# EAGLE board DataCollectorV1 v6 (EAGLE 9.7.0)
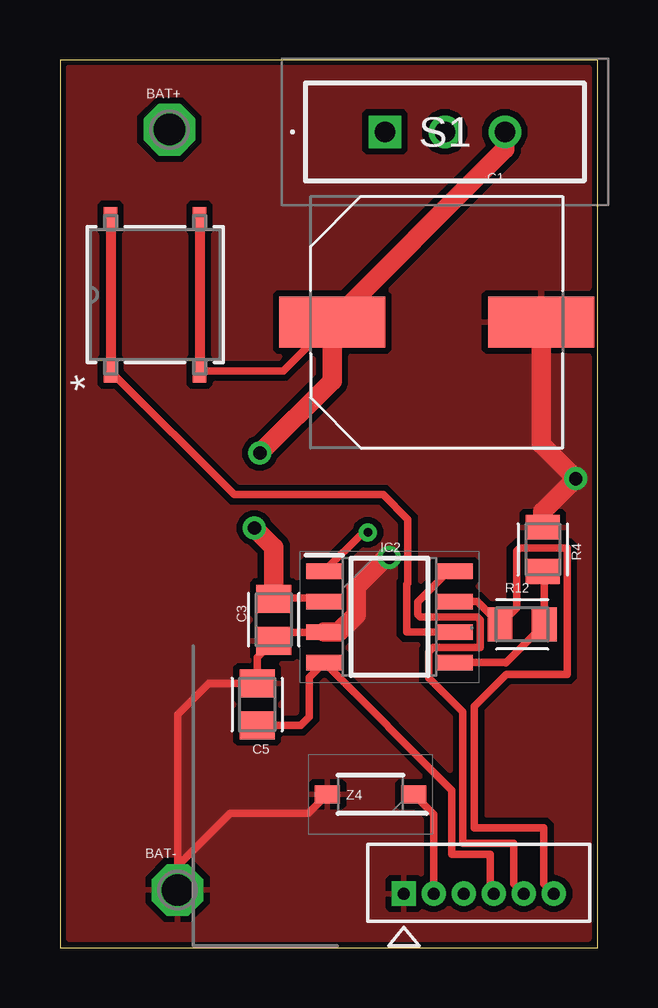
[diagram p0: board, top side]
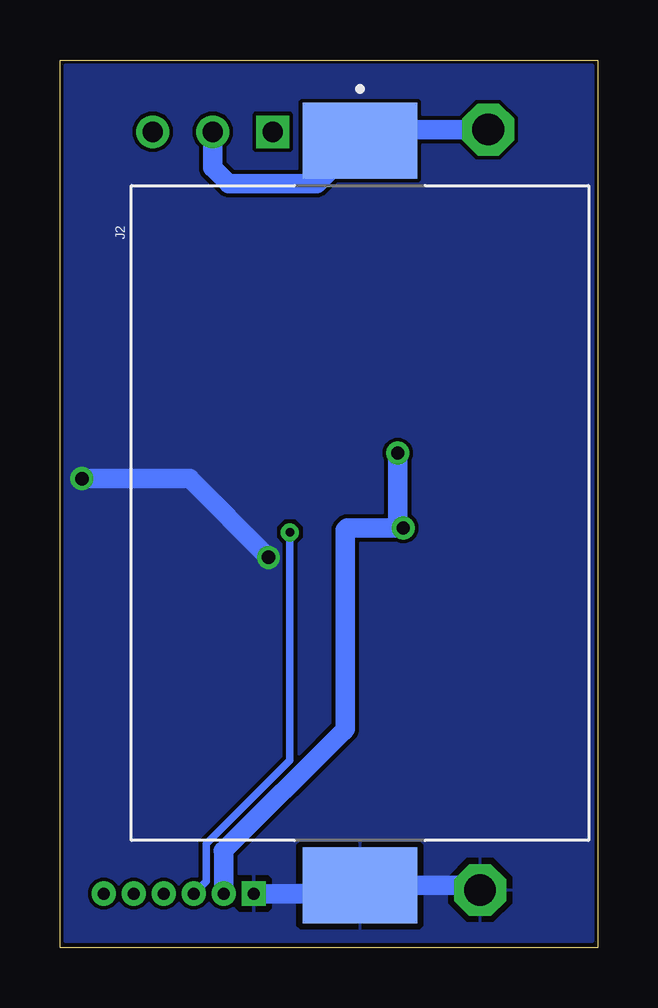
[diagram p1: board, bottom side, seen from below]

Size 22.4 x 37.01 mm. Coordinates in mm from the lower left corner, seen from the top.
Outline: 0,0 22.4,0 22.4,37.01 0,37.01 0,0
Copper layers (1*16): Top / Bottom
Stack-up Default Layer Stack: Top User Defined 0.035mm / Dielectric-1 User Defined 1.5mm / Bottom User Defined 0.035mm
Design rules: minimum copper width 6mil, minimum drill size 0.35mm, copper clearance wire_polygon to wire_polygon 6mil, copper clearance wire_polygon to pad_smd 6mil, copper clearance wire_polygon to via 6mil, copper clearance pad_smd to pad_smd 6mil, copper clearance pad_smd to via 6mil, copper clearance via to via 6mil, copper clearance smd to pad (same net) 6mil, copper clearance smd to via (same net) 6mil, copper clearance smd to smd (same net) 6mil, dimension clearance 6mil, via restrict clearance 0mil, restrict clearance 0mil, drill distance 6mil, keepout clearance 0mil

## Footprints (pad centres in the part's own frame; a part is rotated, then mirrored left to right if it is on the bottom)
P1-13 = drill 1.321 pad 2.159 octagon: TP 0,0
CAPAE1030X1050N = smd 4.416 x 2.115: 1 -4.353,0; 2 4.353,0
CAPC2012X110 = smd 1.165 x 1.465: 1 -0.875,0; 2 0.875,0
SOIC127P600X175-8N = smd 1.525 x 0.65: 1 -2.712,1.905; 2 -2.712,0.635; 3 -2.712,-0.635; 4 -2.712,-1.905; 5 2.712,-1.905; 6 2.712,-0.635; 7 2.712,0.635; 8 2.712,1.905
CON_530470610_MOL = drill 0.5 pad 0.85 square: 1 0,0 | drill 0.5 pad 0.85: 2 -1.25,0; 3 -2.5,0; 4 -3.75,0; 5 -5,0; 6 -6.25,0
796136-1 = smd 3.15 x 4.78: 1 -15.52,0; 2 15.52,0
RESC2012X65 = smd 1.031 x 1.42: 1 -0.919,0; 2 0.919,0
SLW1166415ASD = drill 0.84 pad 1.365 square: 1 0,0 | drill 0.84 pad 1.365: 2 2.5,0; 3 5,0
SMT_FS = smd 0.953 x 0.559: 1 -3.181,1.854; 2 3.181,1.854; 3 -3.181,-1.854; 4 3.181,-1.854
SOD3716X135N = smd 1.05 x 0.75: 1 -1.8,0; 2 1.8,0

## Placement (x,y rotation side)
BAT+  BAT+  [P1-13]  4.56,34.11 0 top
BAT-  BAT-GND  [P1-13]  4.9,2.41 0 top
C1  [CAPAE1030X1050N]  15.69,26.09 0 top
C3  100nF  [CAPC2012X110]  8.91,13.68 270 top
C5  1uF  [CAPC2012X110]  8.21,10.14 90 top
IC2  STM32C011J6M6  [SOIC127P600X175-8N]  13.73,13.8 0 top
J1  530470610CON_530470610_MOL  [CON_530470610_MOL]  14.33,2.26 180 top
J2  796136-1  [796136-1]  9.91,18.13 270 bottom
R4  NTC10K  [RESC2012X65]  20.12,16.61 90 top
R12  20k  [RESC2012X65]  19.25,13.48 0 top
S1  SLW-116641-5A-S-D  [SLW1166415ASD]  13.54,34.02 0 top
U1  PTS526_SK15_SMTR2_LFSSMT_FS  [SMT_FS]  3.96,27.23 90 top
Z4  MMSZ4685-TP  [SOD3716X135N]  12.94,6.4 180 top

## Library data of the parts
BAT+ BAT- = testpad
C1 = Tinkercad; CATEGORY: Capacitor
C3 C5 = Capacitor; CATEGORY: Capacitor
IC2 = STM32C011J6M6; DESCRIPTION: Mainstream Arm Cortex-M0+ MCU with 32 Kbytes of Flash memory, 6 Kbytes RAM, 48 MHz CPU, 2x USART, timers, ADC, comm. I/F, 2-3.6V; HEIGHT: 1.75mm; MANUFACTURER_NAME: STMicroelectronics; MANUFACTURER_PART_NUMBER: STM32C011J6M6; MOUSER_PART_NUMBER: 511-STM32C011J6M6; MOUSER_PRICE-STOCK: https://www.mouser.co.uk/ProductDetail/STMicroelectronics/STM32C011J6M6?qs=IPgv5n7u5Qas2LaNYHG%2FbQ%3D%3D
J1 = Library; COPYRIGHT: Copyright (C) 2024 Ultra Librarian. All rights reserved.; MANUFACTURER_PART_NUMBER: 530470610; MFR_NAME: Molex Connector Corporation
J2 = Connectors; CREATED_BY: PCBLayout.com; DIGIKEY_PART_NUMBER: A99327CT-ND; MANUFACTURER: TE Connectivity AMP Connectors; MPN: 796136-1
R4 R12 = Resistor; CATEGORY: Resistor; SUB-CATEGORY: Fixed
S1 = SLW-116641-5A-S-D; ARROW_PART_NUMBER: SLW-116641-5A-S-D; ARROW_PRICE-STOCK: https://www.arrow.com/en/products/slw-116641-5a-s-d/cui-devices?utm_currency=USD&region=nac; DESCRIPTION: 11.6 x 6 x 4.1 mm, 5 mm Raised Slide Actuator, Through Hole, Slide Switch; HEIGHT: 11.3mm; MANUFACTURER_NAME: Same Sky; MANUFACTURER_PART_NUMBER: SLW-116641-5A-S-D; MOUSER_PART_NUMBER: 179-SLW1166415ASD; MOUSER_PRICE-STOCK: https://www.mouser.co.uk/ProductDetail/Same-Sky/SLW-116641-5A-S-D?qs=IKkN%2F947nfBZSdW8n5Vqgw%3D%3D
U1 = 2023-10-17_07-06-43_Library; COPYRIGHT: Copyright (C) 2023 Ultra Librarian. All rights reserved.; MANUFACTURER_PART_NUMBER: PTS526 SK15 SMTR2 LFS; MFR_NAME: C&K Components
Z4 = MMSZ4685-TP; DESCRIPTION: Zener Diodes; HEIGHT: 1.35mm; MANUFACTURER_NAME: MCC; MANUFACTURER_PART_NUMBER: MMSZ4685-TP; MOUSER_PART_NUMBER: 833-MMSZ4685-TP; MOUSER_PRICE-STOCK: https://www.mouser.co.uk/ProductDetail/Micro-Commercial-Components-MCC/MMSZ4685-TP?qs=SdqRYZZ9IxCNMMu0fTwT6A%3D%3D

## Nets
GND: BAT-.TP C1.2 C3.2 C5.2 IC2.3 J1.1 J2.2 R4.2 Z4.2
MEMORY: IC2.6 U1.1 U1.2
N$1: BAT+.TP J2.1 S1.2
NTC: IC2.5 R4.1 R12.2
RST: C5.1 IC2.4 J1.4
SWCLK: IC2.8 J1.5
SWDIO: IC2.7 J1.6 R12.1
TXD: IC2.1 J1.3
VDD: C1.1 C3.1 IC2.2 J1.2 S1.3 U1.3 U1.4 Z4.1

## Tracks (layer width: path | path; a pad name or v marks a point on that pad's centre or on a via)
GND  (via drill 0.55)
  Top 0.305: IC2.3 10.99,13.14 9.25,13.14 C3.2 8.21,12.11 C5.2 6.19,11.02 6.17,11 4.9,9.72 BAT-.TP 4.9,3.42 7.09,5.61 10.35,5.61 Z4.2 | C1.2 20.04,26.06
  Top 0.813: v13.72,16.28 13.56,16.28 12.34,15.05 12.34,13.88 11.62,13.16 IC2.3 | 20.04,26.06 20.04,21 v21.49,19.56 20.12,18.19 R4.2
  Bottom 0.305: 5.09,2.61 BAT-.TP | 10.25,2.26 J2.2
  Bottom 0.813: BAT-.TP 5.09,2.61 J2.2 10.25,2.26 J1.1 | v13.72,16.28 16.99,19.56 v21.49,19.56
  pour Bottom: 0.15,36.93 22.25,36.93 22.25,0.2 0.15,0.2 0.15,0.1
  pour Top (isolate 0.254): 0.15,36.8 22.28,36.8 22.28,0.15 0.13,0.15 0.13,0.2
MEMORY
  Top 0.305: U1.1 2.14,24.01 7.26,18.9 13.46,18.9 14.5,17.86 14.5,15.2 14.45,15.14 14.45,13.16 IC2.6
  Top 0.406: U1.2 U1.1 2.14,24.01
N$1
  Bottom 0.305: 9.44,34.11 J2.1
  Bottom 0.813: J2.1 10.42,33.13 | 10.42,33.13 11.7,31.85 15.37,31.85 16.04,32.52 S1.2 | BAT+.TP 9.44,34.11 10.42,33.13
NTC
  Top 0.305: IC2.5 18.57,11.89 R12.2 20.17,15.64 R4.1
RST
  Top 0.305: C5.1 10.03,9.27 10.39,9.63 10.39,11.27 IC2.4 16.33,6.58 16.33,3.91 17.93,3.91 17.93,2.41 J1.4
SWCLK
  Top 0.305: IC2.8 16.19,15.7 14.91,14.42 14.91,13.89 15.01,13.79 17.38,13.79 17.47,13.71 17.51,13.67 17.51,12.71 17.5,12.71 17.5,12.52 15.55,12.52 15.37,12.34 15.37,11.26 16.79,9.85 16.79,4.36 18.91,4.36 18.91,2.68 J1.5
SWDIO
  Top 0.305: IC2.7 17.39,14.43 R12.1 19.02,14.18 19.02,16.54 19.15,16.66 21.13,16.66 21.13,11.4 18.59,11.4 17.27,10.07 17.27,5 20.16,5 20.16,2.68 J1.6
TXD  (via drill 0.35)
  Top 0.305: v12.83,17.32 12.63,17.32 IC2.1
  Bottom 0.305: J1.3 16.31,2.78 16.31,4.33 12.83,7.81 v12.83,17.32
VDD  (via drill 0.55)
  Top 0.305: IC2.2 10.86,14.59 8.91,14.59 C3.1 | C1.1 11,25.75 9.3,24.05 U1.3 | J1.2 15.58,5.56 Z4.1
  Top 0.406: U1.4 U1.3
  Top 0.813: C1.1 11.34,23.63 v8.33,20.62 | v8.1,17.5 8.91,16.7 C3.1 | S1.3 18.54,33.29 11,25.75
  Bottom 0.813: v8.33,20.62 8.33,17.73 v8.1,17.5 10.44,17.5 10.52,17.42 10.52,9.12 10.6,9.03 15.6,4.04 15.58,4.02 J1.2